# Altium PCB 数粒机接收板12通道.PcbDoc (part 5 of 5)
Units mm, origin at the board's own origin, x right, y up, seen from the top; angles counter-clockwise.
Board outline 316 x 52 mm, 2 copper layers (Top Layer, Bottom Layer); 209 components, 115 nets, 614 pads, 284 vias.
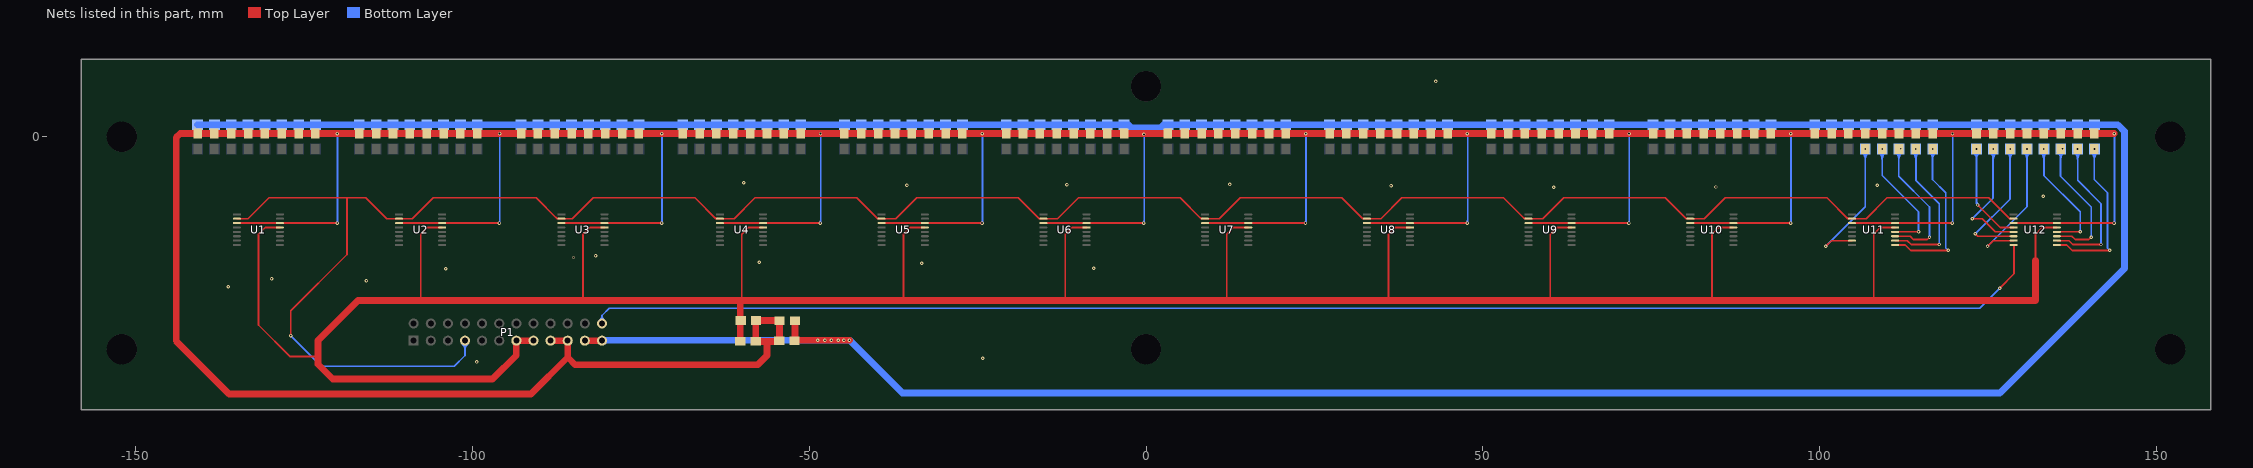
[diagram p5: the nets of this part, all layers, seen from the top]

## Via types
v1: diameter 0.508, hole 0.254, Top Layer to Bottom Layer, 284 vias

## Nets (pads, with @x,y where several pads share a name; then routed paths per layer and width w, separated by ;. In a path a pad name is that pad's centre, name@x,y a point inside that pad or via, vN(x,y) a via of type N, cw(c..) or ccw(c..) an arc to the next point about the centre after c; other vN are vias at no path point) (continued)
CH11-4: D84.1 R84.2 U11.7 | length 37.6
  Top Layer w0.254: v1(100.887,-16.237) 101.724,-15.4 U11.7@104.773,-15.4 ; v1@100.887,-16.11 ccw(c100.887,-15.803) 101.104,-16.02 ; v1@100.887,-16.11 ccw(c100.887,-15.803) 101.104,-16.02 ; v1@100.887,-16.11 ccw(c100.887,-15.803) 101.104,-16.02 ; v1@101.014,-16.237 cw(c101.32,-16.237) 101.104,-16.02 ; v1@101.014,-16.237 cw(c101.32,-16.237) 101.104,-16.02 ; v1@101.014,-16.237 cw(c101.32,-16.237) 101.104,-16.02
  Bottom Layer w0.254: v1(100.887,-16.237) 106.74,-10.383 D84.1@106.74,-2.086 ; v1@100.887,-16.11 ccw(c100.887,-15.803) 101.104,-16.02 ; v1@100.887,-16.11 ccw(c100.887,-15.803) 101.104,-16.02 ; v1@100.887,-16.11 ccw(c100.887,-15.803) 101.104,-16.02 ; v1@101.014,-16.237 cw(c101.32,-16.237) 101.104,-16.02 ; v1@101.014,-16.237 cw(c101.32,-16.237) 101.104,-16.02 ; v1@101.014,-16.237 cw(c101.32,-16.237) 101.104,-16.02 ; D84.1@106.274,-2.276 cw(c105.149,-3.401) 106.74,-3.401 ; D84.1@106.274,-2.276 cw(c105.149,-3.401) 106.74,-3.401 ; D84.1@106.274,-2.276 cw(c105.149,-3.401) 106.74,-3.401 ; D84.1@106.454,-2.096 cw(c105.763,-2.787) 106.74,-2.787 ; D84.1@106.454,-2.096 cw(c105.763,-2.787) 106.74,-2.787 ; D84.1@106.454,-2.096 cw(c105.763,-2.787) 106.74,-2.787 ; D84.1@106.66,-1.89 cw(c106.468,-2.082) D84.1@106.74,-2.082 ; D84.1@106.66,-1.89 cw(c106.468,-2.082) D84.1@106.74,-2.082 ; D84.1@106.66,-1.89 cw(c106.468,-2.082) D84.1@106.74,-2.082 ; 106.74,-3.449 cw(c108.399,-3.449) D84.1@107.226,-2.276 ; 106.74,-3.449 cw(c108.399,-3.449) D84.1@107.226,-2.276 ; 106.74,-3.449 cw(c108.399,-3.449) D84.1@107.226,-2.276 ; 106.74,-2.836 cw(c107.786,-2.836) D84.1@107.046,-2.096 ; 106.74,-2.836 cw(c107.786,-2.836) D84.1@107.046,-2.096 ; 106.74,-2.836 cw(c107.786,-2.836) D84.1@107.046,-2.096 ; D84.1@106.74,-2.131 cw(c107.081,-2.131) D84.1@106.84,-1.89 ; D84.1@106.74,-2.131 cw(c107.081,-2.131) D84.1@106.84,-1.89 ; D84.1@106.74,-2.131 cw(c107.081,-2.131) D84.1@106.84,-1.89
  other v1: 106.75,-1.8
CH11-5: D85.1 R85.2 U11.12 | length 33.5
  Top Layer w0.254: U11.12@111.224,-14.1 114.629,-14.1 v1(114.654,-14.076) ; 114.288,-14.1 ccw(c114.288,-13.71) v1@114.564,-13.986 ; 114.288,-14.1 ccw(c114.288,-13.71) v1@114.564,-13.986 ; 114.288,-14.1 ccw(c114.288,-13.71) v1@114.564,-13.986
  Bottom Layer w0.254: D85.1@109.255,-2.05 109.255,-5.73 114.654,-11.129 v1(114.654,-14.076) ; D85.1@108.774,-2.276 cw(c107.614,-3.436) 109.255,-3.436 ; D85.1@108.774,-2.276 cw(c107.614,-3.436) 109.255,-3.436 ; D85.1@108.774,-2.276 cw(c107.614,-3.436) 109.255,-3.436 ; D85.1@108.954,-2.096 cw(c108.227,-2.823) 109.255,-2.823 ; D85.1@108.954,-2.096 cw(c108.227,-2.823) 109.255,-2.823 ; D85.1@108.954,-2.096 cw(c108.227,-2.823) 109.255,-2.823 ; D85.1@109.16,-1.89 cw(c108.932,-2.118) D85.1@109.255,-2.118 ; D85.1@109.16,-1.89 cw(c108.932,-2.118) D85.1@109.255,-2.118 ; D85.1@109.16,-1.89 cw(c108.932,-2.118) D85.1@109.255,-2.118 ; 109.255,-3.414 cw(c110.864,-3.414) D85.1@109.726,-2.276 ; 109.255,-3.414 cw(c110.864,-3.414) D85.1@109.726,-2.276 ; 109.255,-3.414 cw(c110.864,-3.414) D85.1@109.726,-2.276 ; 109.255,-2.8 cw(c110.25,-2.8) D85.1@109.546,-2.096 ; 109.255,-2.8 cw(c110.25,-2.8) D85.1@109.546,-2.096 ; 109.255,-2.8 cw(c110.25,-2.8) D85.1@109.546,-2.096 ; D85.1@109.255,-2.095 cw(c109.546,-2.095) D85.1@109.34,-1.89 ; D85.1@109.255,-2.095 cw(c109.546,-2.095) D85.1@109.34,-1.89 ; D85.1@109.255,-2.095 cw(c109.546,-2.095) D85.1@109.34,-1.89 ; 114.654,-13.769 cw(c114.347,-13.769) 114.564,-13.986 ccw(c114.347,-13.769) 114.654,-13.769 ; 114.654,-13.769 ccw(c114.96,-13.769) 114.743,-13.986 cw(c114.96,-13.769) 114.654,-13.769
  other v1: 109.25,-1.8
CH11-6: D86.1 R86.2 U11.11 | length 34
  Top Layer w0.254: U11.11@111.224,-14.75 113.398,-14.75 113.892,-15.244 115.924,-15.244 v1(116.279,-14.888)
  Bottom Layer w0.254: D86.1@111.718,-2.013 111.718,-5.857 116.279,-10.418 v1(116.279,-14.888) ; D86.1@111.274,-2.276 cw(c110.202,-3.348) 111.718,-3.348 ; D86.1@111.274,-2.276 cw(c110.202,-3.348) 111.718,-3.348 ; D86.1@111.274,-2.276 cw(c110.202,-3.348) 111.718,-3.348 ; D86.1@111.454,-2.096 cw(c110.815,-2.735) 111.718,-2.735 ; D86.1@111.454,-2.096 cw(c110.815,-2.735) 111.718,-2.735 ; D86.1@111.454,-2.096 cw(c110.815,-2.735) 111.718,-2.735 ; 111.718,-3.501 cw(c113.451,-3.501) D86.1@112.226,-2.276 ; 111.718,-3.501 cw(c113.451,-3.501) D86.1@112.226,-2.276 ; 111.718,-3.501 cw(c113.451,-3.501) D86.1@112.226,-2.276 ; 111.718,-2.888 cw(c112.838,-2.888) D86.1@112.046,-2.096 ; 111.718,-2.888 cw(c112.838,-2.888) D86.1@112.046,-2.096 ; 111.718,-2.888 cw(c112.838,-2.888) D86.1@112.046,-2.096 ; v1@116.189,-14.799 ccw(c115.973,-14.582) 116.279,-14.582 ; v1@116.189,-14.799 ccw(c115.973,-14.582) 116.279,-14.582 ; v1@116.189,-14.799 ccw(c115.973,-14.582) 116.279,-14.582 ; 116.279,-14.582 ccw(c116.586,-14.582) v1@116.369,-14.799 ; 116.279,-14.582 ccw(c116.586,-14.582) v1@116.369,-14.799 ; 116.279,-14.582 ccw(c116.586,-14.582) v1@116.369,-14.799
  other v1: 112.026,-1.775
CH11-7: D87.1 R87.2 U11.10 | length 38.9
  Top Layer w0.254: U11.10@111.224,-15.4 112.981,-15.4 113.561,-15.981 v1(117.727,-15.981) ; 117.42,-15.981 cw(c117.42,-16.287) v1@117.637,-16.07 ; 117.42,-15.981 ccw(c117.42,-15.674) v1@117.637,-15.891 ; 117.42,-15.981 cw(c117.42,-16.287) v1@117.637,-16.07 ; 117.42,-15.981 ccw(c117.42,-15.674) v1@117.637,-15.891 ; 117.42,-15.981 ccw(c117.42,-15.674) v1@117.637,-15.891 ; 117.42,-15.981 cw(c117.42,-16.287) v1@117.637,-16.07
  Bottom Layer w0.254: D87.1@114.258,-2.053 114.258,-6.441 117.727,-9.91 v1(117.727,-15.981) ; D87.1@113.774,-2.276 cw(c112.605,-3.445) 114.258,-3.445 ; D87.1@113.774,-2.276 cw(c112.605,-3.445) 114.258,-3.445 ; D87.1@113.774,-2.276 cw(c112.605,-3.445) 114.258,-3.445 ; D87.1@113.954,-2.096 cw(c113.218,-2.832) 114.258,-2.832 ; D87.1@113.954,-2.096 cw(c113.218,-2.832) 114.258,-2.832 ; D87.1@113.954,-2.096 cw(c113.218,-2.832) 114.258,-2.832 ; D87.1@114.16,-1.89 cw(c113.923,-2.127) D87.1@114.258,-2.127 ; D87.1@114.16,-1.89 cw(c113.923,-2.127) D87.1@114.258,-2.127 ; D87.1@114.16,-1.89 cw(c113.923,-2.127) D87.1@114.258,-2.127 ; 114.258,-3.404 cw(c115.854,-3.404) D87.1@114.726,-2.276 ; 114.258,-3.404 cw(c115.854,-3.404) D87.1@114.726,-2.276 ; 114.258,-3.404 cw(c115.854,-3.404) D87.1@114.726,-2.276 ; 114.258,-2.791 cw(c115.241,-2.791) D87.1@114.546,-2.096 ; 114.258,-2.791 cw(c115.241,-2.791) D87.1@114.546,-2.096 ; 114.258,-2.791 cw(c115.241,-2.791) D87.1@114.546,-2.096 ; D87.1@114.258,-2.086 cw(c114.536,-2.086) D87.1@114.34,-1.89 ; D87.1@114.258,-2.086 cw(c114.536,-2.086) D87.1@114.34,-1.89 ; D87.1@114.258,-2.086 cw(c114.536,-2.086) D87.1@114.34,-1.89 ; v1@117.637,-15.891 ccw(c117.42,-15.674) 117.727,-15.674 ; v1@117.637,-15.891 ccw(c117.42,-15.674) 117.727,-15.674 ; v1@117.637,-15.891 ccw(c117.42,-15.674) 117.727,-15.674 ; 117.727,-15.674 ccw(c118.034,-15.674) v1@117.817,-15.891 ; 117.727,-15.674 ccw(c118.034,-15.674) v1@117.817,-15.891 ; 117.727,-15.674 ccw(c118.034,-15.674) v1@117.817,-15.891
  other v1: 114.25,-1.8
CH11-8: D88.1 R88.2 U11.9 | length 38.3
  Top Layer w0.254: U11.9@111.224,-16.05 112.666,-16.05 113.485,-16.87 119.022,-16.87 v1(119.048,-16.844) ; 118.68,-16.87 ccw(c118.68,-16.476) v1@118.958,-16.754 ; 118.68,-16.87 ccw(c118.68,-16.476) v1@118.958,-16.754 ; 118.68,-16.87 ccw(c118.68,-16.476) v1@118.958,-16.754
  Bottom Layer w0.254: D88.1@116.722,-2.017 116.722,-6.34 118.692,-8.31 118.692,-16.489 v1(119.048,-16.844) ; D88.1@116.274,-2.276 cw(c115.192,-3.358) 116.722,-3.358 ; D88.1@116.274,-2.276 cw(c115.192,-3.358) 116.722,-3.358 ; D88.1@116.274,-2.276 cw(c115.192,-3.358) 116.722,-3.358 ; D88.1@116.454,-2.096 cw(c115.806,-2.744) 116.722,-2.744 ; D88.1@116.454,-2.096 cw(c115.806,-2.744) 116.722,-2.744 ; D88.1@116.454,-2.096 cw(c115.806,-2.744) 116.722,-2.744 ; 116.722,-3.492 cw(c118.442,-3.492) D88.1@117.226,-2.276 ; 116.722,-3.492 cw(c118.442,-3.492) D88.1@117.226,-2.276 ; 116.722,-3.492 cw(c118.442,-3.492) D88.1@117.226,-2.276 ; 116.722,-2.879 cw(c117.829,-2.879) D88.1@117.046,-2.096 ; 116.722,-2.879 cw(c117.829,-2.879) D88.1@117.046,-2.096 ; 116.722,-2.879 cw(c117.829,-2.879) D88.1@117.046,-2.096 ; D88.1@116.722,-2.174 cw(c117.124,-2.174) D88.1@116.84,-1.89 ; D88.1@116.722,-2.174 cw(c117.124,-2.174) D88.1@116.84,-1.89 ; D88.1@116.722,-2.174 cw(c117.124,-2.174) D88.1@116.84,-1.89
  other v1: 116.75,-1.8
CH12: P1.24 U12.8 | length 225.7
  Top Layer w0.254: v1(126.7,-22.45) 128.824,-20.326 128.824,-16.101 U12.8@128.773,-16.05 ; v1@126.7,-22.323 ccw(c126.7,-22.017) 126.917,-22.233 ; v1@126.7,-22.323 ccw(c126.7,-22.017) 126.917,-22.233 ; v1@126.7,-22.323 ccw(c126.7,-22.017) 126.917,-22.233 ; v1@126.827,-22.45 cw(c127.134,-22.45) 126.917,-22.233 ; v1@126.827,-22.45 cw(c127.134,-22.45) 126.917,-22.233 ; v1@126.827,-22.45 cw(c127.134,-22.45) 126.917,-22.233 ; U12.8@128.757,-16.066 cw(c128.595,-16.228) 128.824,-16.228 ccw(c128.595,-16.228) U12.8@128.757,-16.066
  Bottom Layer w0.254: P1.24@-80.742,-27.708 -80.742,-26.514 ; v1(126.7,-22.45) 123.725,-25.425 -79.653,-25.425 -80.742,-26.514 ; P1.24@-81.098,-27.197 ccw(c-81.574,-26.514) -80.742,-26.514 ; P1.24@-81.098,-27.197 ccw(c-81.574,-26.514) -80.742,-26.514 ; P1.24@-81.098,-27.197 ccw(c-81.574,-26.514) -80.742,-26.514 ; -80.742,-26.514 ccw(c-79.91,-26.514) P1.24@-80.386,-27.197 ; -80.742,-26.514 ccw(c-79.91,-26.514) P1.24@-80.386,-27.197 ; -80.742,-26.514 ccw(c-79.91,-26.514) P1.24@-80.386,-27.197 ; 126.483,-22.667 cw(c126.7,-22.884) v1@126.7,-22.577 ; 126.483,-22.667 ccw(c126.266,-22.45) v1@126.573,-22.45 ; 126.483,-22.667 cw(c126.7,-22.884) v1@126.7,-22.577 ; 126.483,-22.667 ccw(c126.266,-22.45) v1@126.573,-22.45 ; 126.483,-22.667 ccw(c126.266,-22.45) v1@126.573,-22.45 ; 126.483,-22.667 cw(c126.7,-22.884) v1@126.7,-22.577
CH12-1: D89.1 R89.2 U12.4 | length 32.6
  Top Layer w0.254: v1(123.429,-10.111) 126.769,-13.45 U12.4@128.773,-13.45 ; v1@123.429,-10.238 cw(c123.429,-10.544) 123.646,-10.328 ; v1@123.429,-10.238 cw(c123.429,-10.544) 123.646,-10.328 ; v1@123.429,-10.238 cw(c123.429,-10.544) 123.646,-10.328 ; v1@123.556,-10.111 ccw(c123.863,-10.111) 123.646,-10.328 ; v1@123.556,-10.111 ccw(c123.863,-10.111) 123.646,-10.328 ; v1@123.556,-10.111 ccw(c123.863,-10.111) 123.646,-10.328
  Bottom Layer w0.254: v1(123.25,-1.8) 123.25,-9.931 v1(123.429,-10.111) ; D89.1@122.774,-2.276 cw(c121.625,-3.425) 123.25,-3.425 ; D89.1@122.774,-2.276 cw(c121.625,-3.425) 123.25,-3.425 ; D89.1@122.774,-2.276 cw(c121.625,-3.425) 123.25,-3.425 ; D89.1@122.954,-2.096 cw(c122.239,-2.811) 123.25,-2.811 ; D89.1@122.954,-2.096 cw(c122.239,-2.811) 123.25,-2.811 ; D89.1@122.954,-2.096 cw(c122.239,-2.811) 123.25,-2.811 ; D89.1@123.16,-1.89 cw(c122.943,-2.107) D89.1@123.25,-2.107 ; D89.1@123.16,-1.89 cw(c122.943,-2.107) D89.1@123.25,-2.107 ; D89.1@123.16,-1.89 cw(c122.943,-2.107) D89.1@123.25,-2.107 ; 123.25,-9.371 ccw(c124.169,-9.371) v1@123.519,-10.021 ; 123.25,-9.371 ccw(c124.169,-9.371) v1@123.519,-10.021 ; 123.25,-9.371 ccw(c124.169,-9.371) v1@123.519,-10.021 ; 123.25,-3.425 cw(c124.875,-3.425) D89.1@123.726,-2.276 ; 123.25,-3.425 cw(c124.875,-3.425) D89.1@123.726,-2.276 ; 123.25,-3.425 cw(c124.875,-3.425) D89.1@123.726,-2.276 ; 123.25,-2.812 cw(c124.262,-2.812) D89.1@123.546,-2.096 ; 123.25,-2.812 cw(c124.262,-2.812) D89.1@123.546,-2.096 ; 123.25,-2.812 cw(c124.262,-2.812) D89.1@123.546,-2.096 ; D89.1@123.25,-2.107 cw(c123.557,-2.107) D89.1@123.34,-1.89 ; D89.1@123.25,-2.107 cw(c123.557,-2.107) D89.1@123.34,-1.89 ; D89.1@123.25,-2.107 cw(c123.557,-2.107) D89.1@123.34,-1.89
CH12-2: D90.1 R90.2 U12.5 | length 34.7
  Top Layer w0.254: v1(122.626,-12.171) 124.125,-12.171 126.054,-14.1 U12.5@128.773,-14.1 ; v1@122.716,-12.26 cw(c122.933,-12.477) 122.933,-12.171 ; v1@122.716,-12.26 cw(c122.933,-12.477) 122.933,-12.171 ; v1@122.716,-12.26 cw(c122.933,-12.477) 122.933,-12.171 ; v1@122.716,-12.081 ccw(c122.933,-11.864) 122.933,-12.171 ; v1@122.716,-12.081 ccw(c122.933,-11.864) 122.933,-12.171 ; v1@122.716,-12.081 ccw(c122.933,-11.864) 122.933,-12.171
  Bottom Layer w0.254: v1(122.626,-12.171) 125.711,-9.086 D90.1@125.711,-2.057 ; v1@122.626,-12.044 ccw(c122.626,-11.737) 122.843,-11.954 ; v1@122.626,-12.044 ccw(c122.626,-11.737) 122.843,-11.954 ; v1@122.626,-12.044 ccw(c122.626,-11.737) 122.843,-11.954 ; v1@122.753,-12.171 cw(c123.06,-12.171) 122.843,-11.954 ; v1@122.753,-12.171 cw(c123.06,-12.171) 122.843,-11.954 ; v1@122.753,-12.171 cw(c123.06,-12.171) 122.843,-11.954 ; D90.1@125.274,-2.276 cw(c124.22,-3.33) 125.711,-3.33 ; D90.1@125.274,-2.276 cw(c124.22,-3.33) 125.711,-3.33 ; D90.1@125.274,-2.276 cw(c124.22,-3.33) 125.711,-3.33 ; D90.1@125.454,-2.096 cw(c124.833,-2.717) 125.711,-2.717 ; D90.1@125.454,-2.096 cw(c124.833,-2.717) 125.711,-2.717 ; D90.1@125.454,-2.096 cw(c124.833,-2.717) 125.711,-2.717 ; 125.711,-3.519 cw(c127.469,-3.519) D90.1@126.226,-2.276 ; 125.711,-3.519 cw(c127.469,-3.519) D90.1@126.226,-2.276 ; 125.711,-3.519 cw(c127.469,-3.519) D90.1@126.226,-2.276 ; 125.711,-2.906 cw(c126.856,-2.906) D90.1@126.046,-2.096 ; 125.711,-2.906 cw(c126.856,-2.906) D90.1@126.046,-2.096 ; 125.711,-2.906 cw(c126.856,-2.906) D90.1@126.046,-2.096 ; D90.1@125.711,-2.201 cw(c126.151,-2.201) D90.1@125.84,-1.89 ; D90.1@125.711,-2.201 cw(c126.151,-2.201) D90.1@125.84,-1.89 ; D90.1@125.711,-2.201 cw(c126.151,-2.201) D90.1@125.84,-1.89
  other v1: 125.75,-1.8
CH12-3: D91.1 R91.2 U12.6 | length 36.1
  Top Layer w0.254: v1(123.083,-14.38) 123.083,-14.431 123.402,-14.75 U12.6@128.773,-14.75 ; v1@123.21,-14.38 ccw(c123.64,-14.38) 123.336,-14.684 ; v1@123.21,-14.38 ccw(c123.64,-14.38) 123.336,-14.684 ; v1@123.21,-14.38 ccw(c123.64,-14.38) 123.336,-14.684
  Bottom Layer w0.254: v1(123.083,-14.38) 128.225,-9.238 D91.1@128.225,-2.071 ; v1@123.083,-14.253 ccw(c123.083,-13.947) 123.3,-14.164 ; v1@123.083,-14.253 ccw(c123.083,-13.947) 123.3,-14.164 ; v1@123.083,-14.253 ccw(c123.083,-13.947) 123.3,-14.164 ; v1@123.21,-14.38 cw(c123.517,-14.38) 123.3,-14.164 ; v1@123.21,-14.38 cw(c123.517,-14.38) 123.3,-14.164 ; v1@123.21,-14.38 cw(c123.517,-14.38) 123.3,-14.164 ; D91.1@127.774,-2.276 cw(c126.685,-3.365) 128.225,-3.365 ; D91.1@127.774,-2.276 cw(c126.685,-3.365) 128.225,-3.365 ; D91.1@127.774,-2.276 cw(c126.685,-3.365) 128.225,-3.365 ; D91.1@127.954,-2.096 cw(c127.298,-2.752) 128.225,-2.752 ; D91.1@127.954,-2.096 cw(c127.298,-2.752) 128.225,-2.752 ; D91.1@127.954,-2.096 cw(c127.298,-2.752) 128.225,-2.752 ; 128.225,-3.484 cw(c129.934,-3.484) D91.1@128.726,-2.276 ; 128.225,-3.484 cw(c129.934,-3.484) D91.1@128.726,-2.276 ; 128.225,-3.484 cw(c129.934,-3.484) D91.1@128.726,-2.276 ; 128.225,-2.871 cw(c129.321,-2.871) D91.1@128.546,-2.096 ; 128.225,-2.871 cw(c129.321,-2.871) D91.1@128.546,-2.096 ; 128.225,-2.871 cw(c129.321,-2.871) D91.1@128.546,-2.096 ; D91.1@128.225,-2.166 cw(c128.616,-2.166) D91.1@128.34,-1.89 ; D91.1@128.225,-2.166 cw(c128.616,-2.166) D91.1@128.34,-1.89 ; D91.1@128.225,-2.166 cw(c128.616,-2.166) D91.1@128.34,-1.89
  other v1: 128.25,-1.8
CH12-4: D92.1 R92.2 U12.7 | length 37.6
  Top Layer w0.254: v1(124.887,-16.237) 125.724,-15.4 U12.7@128.773,-15.4 ; v1@124.887,-16.11 ccw(c124.887,-15.803) 125.104,-16.02 ; v1@124.887,-16.11 ccw(c124.887,-15.803) 125.104,-16.02 ; v1@124.887,-16.11 ccw(c124.887,-15.803) 125.104,-16.02 ; v1@125.014,-16.237 cw(c125.32,-16.237) 125.104,-16.02 ; v1@125.014,-16.237 cw(c125.32,-16.237) 125.104,-16.02 ; v1@125.014,-16.237 cw(c125.32,-16.237) 125.104,-16.02
  Bottom Layer w0.254: v1(124.887,-16.237) 130.74,-10.383 D92.1@130.74,-2.086 ; v1@124.887,-16.11 ccw(c124.887,-15.803) 125.104,-16.02 ; v1@124.887,-16.11 ccw(c124.887,-15.803) 125.104,-16.02 ; v1@124.887,-16.11 ccw(c124.887,-15.803) 125.104,-16.02 ; v1@125.014,-16.237 cw(c125.32,-16.237) 125.104,-16.02 ; v1@125.014,-16.237 cw(c125.32,-16.237) 125.104,-16.02 ; v1@125.014,-16.237 cw(c125.32,-16.237) 125.104,-16.02 ; D92.1@130.274,-2.276 cw(c129.149,-3.401) 130.74,-3.401 ; D92.1@130.274,-2.276 cw(c129.149,-3.401) 130.74,-3.401 ; D92.1@130.274,-2.276 cw(c129.149,-3.401) 130.74,-3.401 ; D92.1@130.454,-2.096 cw(c129.763,-2.787) 130.74,-2.787 ; D92.1@130.454,-2.096 cw(c129.763,-2.787) 130.74,-2.787 ; D92.1@130.454,-2.096 cw(c129.763,-2.787) 130.74,-2.787 ; D92.1@130.66,-1.89 cw(c130.468,-2.082) D92.1@130.74,-2.082 ; D92.1@130.66,-1.89 cw(c130.468,-2.082) D92.1@130.74,-2.082 ; D92.1@130.66,-1.89 cw(c130.468,-2.082) D92.1@130.74,-2.082 ; 130.74,-3.449 cw(c132.399,-3.449) D92.1@131.226,-2.276 ; 130.74,-3.449 cw(c132.399,-3.449) D92.1@131.226,-2.276 ; 130.74,-3.449 cw(c132.399,-3.449) D92.1@131.226,-2.276 ; 130.74,-2.836 cw(c131.786,-2.836) D92.1@131.046,-2.096 ; 130.74,-2.836 cw(c131.786,-2.836) D92.1@131.046,-2.096 ; 130.74,-2.836 cw(c131.786,-2.836) D92.1@131.046,-2.096 ; D92.1@130.74,-2.131 cw(c131.081,-2.131) D92.1@130.84,-1.89 ; D92.1@130.74,-2.131 cw(c131.081,-2.131) D92.1@130.84,-1.89 ; D92.1@130.74,-2.131 cw(c131.081,-2.131) D92.1@130.84,-1.89
  other v1: 130.75,-1.8
CH12-5: D93.1 R93.2 U12.12 | length 33.9
  Top Layer w0.254: U12.12@135.224,-14.1 138.629,-14.1 v1(138.654,-14.076) ; 138.288,-14.1 ccw(c138.288,-13.71) v1@138.564,-13.986 ; 138.288,-14.1 ccw(c138.288,-13.71) v1@138.564,-13.986 ; 138.288,-14.1 ccw(c138.288,-13.71) v1@138.564,-13.986
  Bottom Layer w0.254: D93.1@133.255,-2.05 133.255,-5.73 138.654,-11.129 v1(138.654,-14.076) ; D93.1@132.774,-2.276 cw(c131.614,-3.436) 133.255,-3.436 ; D93.1@132.774,-2.276 cw(c131.614,-3.436) 133.255,-3.436 ; D93.1@132.774,-2.276 cw(c131.614,-3.436) 133.255,-3.436 ; D93.1@132.954,-2.096 cw(c132.227,-2.823) 133.255,-2.823 ; D93.1@132.954,-2.096 cw(c132.227,-2.823) 133.255,-2.823 ; D93.1@132.954,-2.096 cw(c132.227,-2.823) 133.255,-2.823 ; D93.1@133.16,-1.89 cw(c132.932,-2.118) D93.1@133.255,-2.118 ; D93.1@133.16,-1.89 cw(c132.932,-2.118) D93.1@133.255,-2.118 ; D93.1@133.16,-1.89 cw(c132.932,-2.118) D93.1@133.255,-2.118 ; 133.255,-3.414 cw(c134.864,-3.414) D93.1@133.726,-2.276 ; 133.255,-3.414 cw(c134.864,-3.414) D93.1@133.726,-2.276 ; 133.255,-3.414 cw(c134.864,-3.414) D93.1@133.726,-2.276 ; 133.255,-2.8 cw(c134.25,-2.8) D93.1@133.546,-2.096 ; 133.255,-2.8 cw(c134.25,-2.8) D93.1@133.546,-2.096 ; 133.255,-2.8 cw(c134.25,-2.8) D93.1@133.546,-2.096 ; D93.1@133.255,-2.095 cw(c133.546,-2.095) D93.1@133.34,-1.89 ; D93.1@133.255,-2.095 cw(c133.546,-2.095) D93.1@133.34,-1.89 ; D93.1@133.255,-2.095 cw(c133.546,-2.095) D93.1@133.34,-1.89 ; v1@138.564,-13.986 ccw(c138.347,-13.769) 138.654,-13.769 ; v1@138.564,-13.986 ccw(c138.347,-13.769) 138.654,-13.769 ; v1@138.564,-13.986 ccw(c138.347,-13.769) 138.654,-13.769 ; 138.654,-13.769 ccw(c138.96,-13.769) v1@138.743,-13.986 ; 138.654,-13.769 ccw(c138.96,-13.769) v1@138.743,-13.986 ; 138.654,-13.769 ccw(c138.96,-13.769) v1@138.743,-13.986
  other v1: 133.25,-1.8
CH12-6: D94.1 R94.2 U12.11 | length 34
  Top Layer w0.254: U12.11@135.224,-14.75 137.398,-14.75 137.892,-15.244 139.924,-15.244 v1(140.279,-14.888)
  Bottom Layer w0.254: D94.1@135.718,-2.013 135.718,-5.857 140.279,-10.418 v1(140.279,-14.888) ; D94.1@135.274,-2.276 cw(c134.202,-3.348) 135.718,-3.348 ; D94.1@135.274,-2.276 cw(c134.202,-3.348) 135.718,-3.348 ; D94.1@135.274,-2.276 cw(c134.202,-3.348) 135.718,-3.348 ; D94.1@135.454,-2.096 cw(c134.815,-2.735) 135.718,-2.735 ; D94.1@135.454,-2.096 cw(c134.815,-2.735) 135.718,-2.735 ; D94.1@135.454,-2.096 cw(c134.815,-2.735) 135.718,-2.735 ; 135.718,-3.501 cw(c137.451,-3.501) D94.1@136.226,-2.276 ; 135.718,-3.501 cw(c137.451,-3.501) D94.1@136.226,-2.276 ; 135.718,-3.501 cw(c137.451,-3.501) D94.1@136.226,-2.276 ; 135.718,-2.888 cw(c136.838,-2.888) D94.1@136.046,-2.096 ; 135.718,-2.888 cw(c136.838,-2.888) D94.1@136.046,-2.096 ; 135.718,-2.888 cw(c136.838,-2.888) D94.1@136.046,-2.096 ; v1@140.189,-14.799 ccw(c139.973,-14.582) 140.279,-14.582 ; v1@140.189,-14.799 ccw(c139.973,-14.582) 140.279,-14.582 ; v1@140.189,-14.799 ccw(c139.973,-14.582) 140.279,-14.582 ; 140.279,-14.582 ccw(c140.586,-14.582) v1@140.369,-14.799 ; 140.279,-14.582 ccw(c140.586,-14.582) v1@140.369,-14.799 ; 140.279,-14.582 ccw(c140.586,-14.582) v1@140.369,-14.799
  other v1: 136.026,-1.775
CH12-7: D95.1 R95.2 U12.10 | length 38.9
  Top Layer w0.254: U12.10@135.224,-15.4 136.981,-15.4 137.561,-15.981 v1(141.727,-15.981) ; 141.42,-15.981 cw(c141.42,-16.287) v1@141.637,-16.07 ; 141.42,-15.981 ccw(c141.42,-15.674) v1@141.637,-15.891 ; 141.42,-15.981 cw(c141.42,-16.287) v1@141.637,-16.07 ; 141.42,-15.981 ccw(c141.42,-15.674) v1@141.637,-15.891 ; 141.42,-15.981 ccw(c141.42,-15.674) v1@141.637,-15.891 ; 141.42,-15.981 cw(c141.42,-16.287) v1@141.637,-16.07
  Bottom Layer w0.254: D95.1@138.258,-2.053 138.258,-6.441 141.727,-9.91 v1(141.727,-15.981) ; D95.1@137.774,-2.276 cw(c136.605,-3.445) 138.258,-3.445 ; D95.1@137.774,-2.276 cw(c136.605,-3.445) 138.258,-3.445 ; D95.1@137.774,-2.276 cw(c136.605,-3.445) 138.258,-3.445 ; D95.1@137.954,-2.096 cw(c137.218,-2.832) 138.258,-2.832 ; D95.1@137.954,-2.096 cw(c137.218,-2.832) 138.258,-2.832 ; D95.1@137.954,-2.096 cw(c137.218,-2.832) 138.258,-2.832 ; D95.1@138.16,-1.89 cw(c137.923,-2.127) D95.1@138.258,-2.127 ; D95.1@138.16,-1.89 cw(c137.923,-2.127) D95.1@138.258,-2.127 ; D95.1@138.16,-1.89 cw(c137.923,-2.127) D95.1@138.258,-2.127 ; 138.258,-3.404 cw(c139.854,-3.404) D95.1@138.726,-2.276 ; 138.258,-3.404 cw(c139.854,-3.404) D95.1@138.726,-2.276 ; 138.258,-3.404 cw(c139.854,-3.404) D95.1@138.726,-2.276 ; 138.258,-2.791 cw(c139.241,-2.791) D95.1@138.546,-2.096 ; 138.258,-2.791 cw(c139.241,-2.791) D95.1@138.546,-2.096 ; 138.258,-2.791 cw(c139.241,-2.791) D95.1@138.546,-2.096 ; D95.1@138.258,-2.086 cw(c138.536,-2.086) D95.1@138.34,-1.89 ; D95.1@138.258,-2.086 cw(c138.536,-2.086) D95.1@138.34,-1.89 ; D95.1@138.258,-2.086 cw(c138.536,-2.086) D95.1@138.34,-1.89 ; v1@141.637,-15.891 ccw(c141.42,-15.674) 141.727,-15.674 ; v1@141.637,-15.891 ccw(c141.42,-15.674) 141.727,-15.674 ; v1@141.637,-15.891 ccw(c141.42,-15.674) 141.727,-15.674 ; 141.727,-15.674 ccw(c142.034,-15.674) v1@141.817,-15.891 ; 141.727,-15.674 ccw(c142.034,-15.674) v1@141.817,-15.891 ; 141.727,-15.674 ccw(c142.034,-15.674) v1@141.817,-15.891
  other v1: 138.25,-1.8
CH12-8: D96.1 R96.2 U12.9 | length 38.3
  Top Layer w0.254: U12.9@135.224,-16.05 136.666,-16.05 137.485,-16.87 143.022,-16.87 v1(143.048,-16.844) ; 142.68,-16.87 ccw(c142.68,-16.476) v1@142.958,-16.754 ; 142.68,-16.87 ccw(c142.68,-16.476) v1@142.958,-16.754 ; 142.68,-16.87 ccw(c142.68,-16.476) v1@142.958,-16.754
  Bottom Layer w0.254: D96.1@140.722,-2.017 140.722,-6.34 142.692,-8.31 142.692,-16.489 v1(143.048,-16.844) ; D96.1@140.274,-2.276 cw(c139.192,-3.358) 140.722,-3.358 ; D96.1@140.274,-2.276 cw(c139.192,-3.358) 140.722,-3.358 ; D96.1@140.274,-2.276 cw(c139.192,-3.358) 140.722,-3.358 ; D96.1@140.454,-2.096 cw(c139.806,-2.744) 140.722,-2.744 ; D96.1@140.454,-2.096 cw(c139.806,-2.744) 140.722,-2.744 ; D96.1@140.454,-2.096 cw(c139.806,-2.744) 140.722,-2.744 ; 140.722,-3.492 cw(c142.442,-3.492) D96.1@141.226,-2.276 ; 140.722,-3.492 cw(c142.442,-3.492) D96.1@141.226,-2.276 ; 140.722,-3.492 cw(c142.442,-3.492) D96.1@141.226,-2.276 ; 140.722,-2.879 cw(c141.829,-2.879) D96.1@141.046,-2.096 ; 140.722,-2.879 cw(c141.829,-2.879) D96.1@141.046,-2.096 ; 140.722,-2.879 cw(c141.829,-2.879) D96.1@141.046,-2.096 ; D96.1@140.722,-2.174 cw(c141.124,-2.174) D96.1@140.84,-1.89 ; D96.1@140.722,-2.174 cw(c141.124,-2.174) D96.1@140.84,-1.89 ; D96.1@140.722,-2.174 cw(c141.124,-2.174) D96.1@140.84,-1.89
  other v1: 140.75,-1.8
EN: P1.7 U1.2 U2.2 U3.2 U4.2 U5.2 U6.2 U7.2 U8.2 U9.2 U10.2 U11.2 U12.2 | length 367.5
  Top Layer w0.254: U1.2@-134.931,-12.15 -133.26,-12.15 -130.156,-9.047 -118.624,-9.047 ; v1(-126.93,-29.493) -126.93,-25.814 -118.574,-17.458 -118.574,-9.097 -118.624,-9.047 ; U12.2@128.773,-12.15 128.168,-12.15 125.065,-9.047 109.977,-9.047 106.873,-12.15 U11.2@104.773,-12.15 104.168,-12.15 101.065,-9.047 85.977,-9.047 82.873,-12.15 U10.2@80.773,-12.15 80.168,-12.15 77.065,-9.047 61.977,-9.047 58.873,-12.15 U9.2@56.773,-12.15 56.168,-12.15 53.065,-9.047 37.977,-9.047 34.873,-12.15 U8.2@32.773,-12.15 32.168,-12.15 29.065,-9.047 13.977,-9.047 10.873,-12.15 U7.2@8.773,-12.15 8.168,-12.15 5.065,-9.047 -10.023,-9.047 -13.127,-12.15 U6.2@-15.227,-12.15 -15.832,-12.15 -18.935,-9.047 -34.023,-9.047 -37.127,-12.15 U5.2@-39.227,-12.15 -39.832,-12.15 -42.935,-9.047 -58.023,-9.047 -61.127,-12.15 U4.2@-63.227,-12.15 -63.832,-12.15 -66.935,-9.047 -82.023,-9.047 -85.127,-12.15 U3.2@-86.773,-12.15 -87.403,-12.15 -90.506,-9.047 -105.772,-9.047 -108.876,-12.15 U2.2@-110.852,-12.15 -112.676,-12.15 -115.779,-9.047 -118.624,-9.047 ; v1@-127.02,-29.404 ccw(c-127.237,-29.187) -126.93,-29.187 ; v1@-127.02,-29.404 ccw(c-127.237,-29.187) -126.93,-29.187 ; v1@-127.02,-29.404 ccw(c-127.237,-29.187) -126.93,-29.187 ; -126.93,-29.187 ccw(c-126.624,-29.187) v1@-126.84,-29.404 ; -126.93,-29.187 ccw(c-126.624,-29.187) v1@-126.84,-29.404 ; -126.93,-29.187 ccw(c-126.624,-29.187) v1@-126.84,-29.404 ; -87.57,-11.983 ccw(c-87.223,-11.637) -87.223,-12.127 cw(c-87.223,-11.637) -87.57,-11.983 ; -63.981,-12.001 ccw(c-63.677,-11.698) -63.677,-12.127 cw(c-63.677,-11.698) -63.981,-12.001 ; -39.981,-12.001 ccw(c-39.677,-11.698) -39.677,-12.127 cw(c-39.677,-11.698) -39.981,-12.001 ; -15.981,-12.001 ccw(c-15.677,-11.698) -15.677,-12.127 cw(c-15.677,-11.698) -15.981,-12.001 ; 8.019,-12.001 ccw(c8.323,-11.698) 8.323,-12.127 cw(c8.323,-11.698) 8.019,-12.001 ; 32.019,-12.001 ccw(c32.323,-11.698) 32.323,-12.127 cw(c32.323,-11.698) 32.019,-12.001 ; 56.019,-12.001 ccw(c56.323,-11.698) 56.323,-12.127 cw(c56.323,-11.698) 56.019,-12.001 ; 80.019,-12.001 ccw(c80.323,-11.698) 80.323,-12.127 cw(c80.323,-11.698) 80.019,-12.001 ; 104.019,-12.001 ccw(c104.323,-11.698) 104.323,-12.127 cw(c104.323,-11.698) 104.019,-12.001 ; 128.019,-12.001 ccw(c128.323,-11.698) 128.323,-12.127 cw(c128.323,-11.698) 128.019,-12.001
  Bottom Layer w0.254: v1(-126.93,-29.493) -122.391,-34.033 -102.637,-34.033 -101.062,-32.458 P1.7@-101.062,-30.248 ; v1@-126.93,-29.62 cw(c-126.93,-29.927) -126.713,-29.71 ; v1@-126.93,-29.62 cw(c-126.93,-29.927) -126.713,-29.71 ; v1@-126.93,-29.62 cw(c-126.93,-29.927) -126.713,-29.71 ; v1@-126.803,-29.493 ccw(c-126.497,-29.493) -126.713,-29.71 ; v1@-126.803,-29.493 ccw(c-126.497,-29.493) -126.713,-29.71 ; v1@-126.803,-29.493 ccw(c-126.497,-29.493) -126.713,-29.71 ; P1.7@-101.502,-30.689 cw(c-102.566,-31.752) -101.062,-31.752 ; P1.7@-101.502,-30.689 cw(c-102.566,-31.752) -101.062,-31.752 ; P1.7@-101.502,-30.689 cw(c-102.566,-31.752) -101.062,-31.752 ; P1.7@-101.323,-30.509 cw(c-101.953,-31.139) -101.062,-31.139 ; P1.7@-101.323,-30.509 cw(c-101.953,-31.139) -101.062,-31.139 ; P1.7@-101.323,-30.509 cw(c-101.953,-31.139) -101.062,-31.139 ; -101.062,-31.752 cw(c-99.558,-31.752) P1.7@-100.621,-30.689 ; -101.062,-31.752 cw(c-99.558,-31.752) P1.7@-100.621,-30.689 ; -101.062,-31.752 cw(c-99.558,-31.752) P1.7@-100.621,-30.689 ; -101.062,-31.139 cw(c-100.171,-31.139) P1.7@-100.801,-30.509 ; -101.062,-31.139 cw(c-100.171,-31.139) P1.7@-100.801,-30.509 ; -101.062,-31.139 cw(c-100.171,-31.139) P1.7@-100.801,-30.509
GND: C1.1 C2.1 C3.1 C4.1 P1.17 P1.19 R1.1 R2.1 R3.1 R4.1 R5.1 R6.1 R7.1 R8.1 R9.1 R10.1 R11.1 R12.1 R13.1 R14.1 R15.1 R16.1 R17.1 R18.1 R19.1 R20.1 R21.1 R22.1 R23.1 R24.1 R25.1 R26.1 R27.1 R28.1 R29.1 R30.1 R31.1 R32.1 R33.1 R34.1 R35.1 R36.1 R37.1 R38.1 R39.1 R40.1 R41.1 R42.1 R43.1 R44.1 R45.1 R46.1 R47.1 R48.1 R49.1 R50.1 R51.1 R52.1 R53.1 R54.1 R55.1 R56.1 R57.1 R58.1 R59.1 R60.1 R61.1 R62.1 R63.1 R64.1 R65.1 R66.1 R67.1 R68.1 R69.1 R70.1 R71.1 R72.1 R73.1 R74.1 R75.1 R76.1 R77.1 R78.1 R79.1 R80.1 R81.1 R82.1 R83.1 R84.1 R85.1 R86.1 R87.1 R88.1 R89.1 R90.1 R91.1 R92.1 R93.1 R94.1 R95.1 R96.1 U1.3 U1.14 U2.3 U2.14 U3.3 U3.14 U4.3 U4.14 U5.3 U5.14 U6.3 U6.14 U7.3 U7.14 U8.3 U8.14 U9.3 U9.14 U10.3 U10.14 U11.3 U11.14 U12.3 U12.14 | length 816.8
  Top Layer w0.254: U1.3@-134.931,-12.8 v1(-120.036,-12.8) ; U2.3@-110.852,-12.8 v1(-95.956,-12.8) ; U3.3@-86.773,-12.8 v1(-71.877,-12.8) ; U4.3@-63.227,-12.8 v1(-48.331,-12.8) ; U5.3@-39.227,-12.8 v1(-24.331,-12.8) ; U6.3@-15.227,-12.8 v1(-0.331,-12.8) ; U7.3@8.773,-12.8 v1(23.669,-12.8) ; U8.3@32.773,-12.8 v1(47.669,-12.8) ; U9.3@56.773,-12.8 v1(71.669,-12.8) ; U10.3@80.773,-12.8 v1(95.669,-12.8) ; U11.3@104.773,-12.8 v1(119.669,-12.8) ; U12.3@128.773,-12.8 U12.14@135.173,-12.8 v1(143.669,-12.8) ; -120.342,-12.8 cw(c-120.342,-13.107) v1@-120.125,-12.89 ; -120.342,-12.8 ccw(c-120.342,-12.493) v1@-120.125,-12.71 ; -120.342,-12.8 cw(c-120.342,-13.107) v1@-120.125,-12.89 ; -120.342,-12.8 ccw(c-120.342,-12.493) v1@-120.125,-12.71 ; -120.342,-12.8 ccw(c-120.342,-12.493) v1@-120.125,-12.71 ; -120.342,-12.8 cw(c-120.342,-13.107) v1@-120.125,-12.89 ; -96.263,-12.8 cw(c-96.263,-13.107) v1@-96.046,-12.89 ; -96.263,-12.8 ccw(c-96.263,-12.493) v1@-96.046,-12.71 ; -96.263,-12.8 cw(c-96.263,-13.107) v1@-96.046,-12.89 ; -96.263,-12.8 ccw(c-96.263,-12.493) v1@-96.046,-12.71 ; -96.263,-12.8 ccw(c-96.263,-12.493) v1@-96.046,-12.71 ; -96.263,-12.8 cw(c-96.263,-13.107) v1@-96.046,-12.89 ; -72.184,-12.8 cw(c-72.184,-13.107) v1@-71.967,-12.89 ; -72.184,-12.8 ccw(c-72.184,-12.493) v1@-71.967,-12.71 ; -72.184,-12.8 cw(c-72.184,-13.107) v1@-71.967,-12.89 ; -72.184,-12.8 ccw(c-72.184,-12.493) v1@-71.967,-12.71 ; -72.184,-12.8 ccw(c-72.184,-12.493) v1@-71.967,-12.71 ; -72.184,-12.8 cw(c-72.184,-13.107) v1@-71.967,-12.89 ; -48.638,-12.8 cw(c-48.638,-13.107) v1@-48.421,-12.89 ; -48.638,-12.8 ccw(c-48.638,-12.493) v1@-48.421,-12.71 ; -48.638,-12.8 cw(c-48.638,-13.107) v1@-48.421,-12.89 ; -48.638,-12.8 ccw(c-48.638,-12.493) v1@-48.421,-12.71 ; -48.638,-12.8 ccw(c-48.638,-12.493) v1@-48.421,-12.71 ; -48.638,-12.8 cw(c-48.638,-13.107) v1@-48.421,-12.89 ; -24.638,-12.8 cw(c-24.638,-13.107) v1@-24.421,-12.89 ; -24.638,-12.8 ccw(c-24.638,-12.493) v1@-24.421,-12.71 ; -24.638,-12.8 cw(c-24.638,-13.107) v1@-24.421,-12.89 ; -24.638,-12.8 ccw(c-24.638,-12.493) v1@-24.421,-12.71 ; -24.638,-12.8 ccw(c-24.638,-12.493) v1@-24.421,-12.71 ; -24.638,-12.8 cw(c-24.638,-13.107) v1@-24.421,-12.89 ; -0.638,-12.8 cw(c-0.638,-13.107) v1@-0.421,-12.89 ; -0.638,-12.8 ccw(c-0.638,-12.493) v1@-0.421,-12.71 ; -0.638,-12.8 cw(c-0.638,-13.107) v1@-0.421,-12.89 ; -0.638,-12.8 ccw(c-0.638,-12.493) v1@-0.421,-12.71 ; -0.638,-12.8 ccw(c-0.638,-12.493) v1@-0.421,-12.71 ; -0.638,-12.8 cw(c-0.638,-13.107) v1@-0.421,-12.89 ; 23.362,-12.8 cw(c23.362,-13.107) v1@23.579,-12.89 ; 23.362,-12.8 ccw(c23.362,-12.493) v1@23.579,-12.71 ; 23.362,-12.8 cw(c23.362,-13.107) v1@23.579,-12.89 ; 23.362,-12.8 ccw(c23.362,-12.493) v1@23.579,-12.71 ; 23.362,-12.8 ccw(c23.362,-12.493) v1@23.579,-12.71 ; 23.362,-12.8 cw(c23.362,-13.107) v1@23.579,-12.89 ; 47.362,-12.8 cw(c47.362,-13.107) v1@47.579,-12.89 ; 47.362,-12.8 ccw(c47.362,-12.493) v1@47.579,-12.71 ; 47.362,-12.8 cw(c47.362,-13.107) v1@47.579,-12.89 ; 47.362,-12.8 ccw(c47.362,-12.493) v1@47.579,-12.71 ; 47.362,-12.8 ccw(c47.362,-12.493) v1@47.579,-12.71 ; 47.362,-12.8 cw(c47.362,-13.107) v1@47.579,-12.89 ; 71.362,-12.8 cw(c71.362,-13.107) v1@71.579,-12.89 ; 71.362,-12.8 ccw(c71.362,-12.493) v1@71.579,-12.71 ; 71.362,-12.8 cw(c71.362,-13.107) v1@71.579,-12.89 ; 71.362,-12.8 ccw(c71.362,-12.493) v1@71.579,-12.71 ; 71.362,-12.8 ccw(c71.362,-12.493) v1@71.579,-12.71 ; 71.362,-12.8 cw(c71.362,-13.107) v1@71.579,-12.89 ; 95.362,-12.8 cw(c95.362,-13.107) v1@95.579,-12.89 ; 95.362,-12.8 ccw(c95.362,-12.493) v1@95.579,-12.71 ; 95.362,-12.8 cw(c95.362,-13.107) v1@95.579,-12.89 ; 95.362,-12.8 ccw(c95.362,-12.493) v1@95.579,-12.71 ; 95.362,-12.8 ccw(c95.362,-12.493) v1@95.579,-12.71 ; 95.362,-12.8 cw(c95.362,-13.107) v1@95.579,-12.89 ; 119.362,-12.8 cw(c119.362,-13.107) v1@119.579,-12.89 ; 119.362,-12.8 ccw(c119.362,-12.493) v1@119.579,-12.71 ; 119.362,-12.8 cw(c119.362,-13.107) v1@119.579,-12.89 ; 119.362,-12.8 ccw(c119.362,-12.493) v1@119.579,-12.71 ; 119.362,-12.8 ccw(c119.362,-12.493) v1@119.579,-12.71 ; 119.362,-12.8 cw(c119.362,-13.107) v1@119.579,-12.89 ; 143.362,-12.8 cw(c143.362,-13.107) v1@143.579,-12.89 ; 143.362,-12.8 ccw(c143.362,-12.493) v1@143.579,-12.71 ; 143.362,-12.8 cw(c143.362,-13.107) v1@143.579,-12.89 ; 143.362,-12.8 ccw(c143.362,-12.493) v1@143.579,-12.71 ; 143.362,-12.8 ccw(c143.362,-12.493) v1@143.579,-12.71 ; 143.362,-12.8 cw(c143.362,-13.107) v1@143.579,-12.89
  Top Layer w1: P1.17@-88.362,-30.248 P1.19@-85.822,-30.248 -85.822,-32.712 ; C2.1@-57.868,-27.258 -54.413,-27.258 C4.1@-54.388,-27.284 -54.388,-30.179 -54.566,-30.357 -56.256,-30.357 ; C2.1@-57.856,-27.276 -57.918,-27.338 C1.1@-57.918,-30.357 -56.256,-30.357 ; v1(143.694,0.486) R96.1@140.75,0.486 R95.1@138.25,0.486 R94.1@135.75,0.486 R93.1@133.25,0.486 R92.1@130.75,0.486 R91.1@128.25,0.486 R90.1@125.75,0.486 R89.1@123.25,0.486 R88.1@116.75,0.486 R87.1@114.25,0.486 R86.1@111.75,0.486 R85.1@109.25,0.486 R84.1@106.75,0.486 R83.1@104.25,0.486 R82.1@101.75,0.486 R81.1@99.25,0.486 R80.1@92.75,0.486 R79.1@90.25,0.486 R78.1@87.75,0.486 R77.1@85.25,0.486 R76.1@82.75,0.486 R75.1@80.25,0.486 R74.1@77.75,0.486 R73.1@75.25,0.486 R72.1@68.742,0.486 R71.1@66.242,0.486 R70.1@63.742,0.486 R69.1@61.242,0.486 R68.1@58.742,0.486 R67.1@56.242,0.486 R66.1@53.742,0.486 R65.1@51.242,0.486 R64.1@44.75,0.486 R63.1@42.25,0.486 R62.1@39.75,0.486 R61.1@37.25,0.486 R60.1@34.75,0.486 R59.1@32.25,0.486 R58.1@29.75,0.486 R57.1@27.25,0.486 R56.1@20.75,0.486 R55.1@18.25,0.486 R54.1@15.75,0.486 R53.1@13.25,0.486 R52.1@10.75,0.486 R51.1@8.25,0.486 R50.1@5.75,0.486 R49.1@3.25,0.486 R48.1@-3.25,0.486 R47.1@-5.75,0.486 R46.1@-8.25,0.486 R45.1@-10.75,0.486 R44.1@-13.25,0.486 R43.1@-15.75,0.486 R42.1@-18.25,0.486 R41.1@-20.75,0.486 R40.1@-27.25,0.486 R39.1@-29.75,0.486 R38.1@-32.25,0.486 R37.1@-34.75,0.486 R36.1@-37.25,0.486 R35.1@-39.75,0.486 R34.1@-42.25,0.486 R33.1@-44.75,0.486 R32.1@-51.25,0.486 R31.1@-53.75,0.486 R30.1@-56.25,0.486 R29.1@-58.75,0.486 R28.1@-61.25,0.486 R27.1@-63.75,0.486 R26.1@-66.25,0.486 R25.1@-68.75,0.486 R24.1@-75.25,0.486 R23.1@-77.75,0.486 R22.1@-80.25,0.486 R21.1@-82.75,0.486 R20.1@-85.25,0.486 R19.1@-87.75,0.486 R18.1@-90.25,0.486 R17.1@-92.75,0.486 R16.1@-99.25,0.486 R15.1@-101.75,0.486 R14.1@-104.25,0.486 R13.1@-106.75,0.486 R12.1@-109.25,0.486 R11.1@-111.75,0.486 R10.1@-114.25,0.486 R9.1@-116.75,0.486 R8.1@-123.258,0.486 R7.1@-125.758,0.486 R6.1@-128.258,0.486 R5.1@-130.758,0.486 R4.1@-133.258,0.486 R3.1@-135.758,0.486 R2.1@-138.258,0.486 R1.1@-140.758,0.486 -143.327,0.486 -143.937,-0.124 -143.937,-30.273 -136.063,-38.147 -91.257,-38.147 -85.822,-32.712 ; -85.822,-32.712 -84.704,-33.829 -57.628,-33.829 -56.256,-32.458 -56.256,-30.357 ; C3.1@-55.198,-30.357 ccw(c-55.198,-29.597) C3.1@-54.661,-30.135 ; C3.1@-55.198,-30.357 ccw(c-55.198,-29.597) C3.1@-54.661,-30.135 ; C3.1@-55.198,-30.357 ccw(c-55.198,-29.597) C3.1@-54.661,-30.135
  Bottom Layer w0.254: v1(-120.036,-12.8) -119.972,-12.737 -119.972,0.448 v1(-120.01,0.486) ; v1(-95.956,-12.8) -95.893,-12.737 v1@-95.893,0.448 ; v1(-71.877,-12.8) -71.814,-12.737 v1@-71.814,0.448 ; v1(-48.331,-12.8) -48.268,-12.737 v1@-48.268,0.448 ; v1(-24.331,-12.8) -24.268,-12.737 v1@-24.268,0.448 ; v1(-0.331,-12.8) -0.268,-12.737 v1@-0.268,0.448 ; v1(23.669,-12.8) 23.732,-12.737 v1@23.732,0.448 ; v1(47.669,-12.8) 47.732,-12.737 v1@47.732,0.448 ; v1(71.669,-12.8) 71.732,-12.737 v1@71.732,0.448 ; v1(95.669,-12.8) 95.732,-12.737 v1@95.732,0.448 ; v1(119.669,-12.8) 119.732,-12.737 v1@119.732,0.448 ; v1(143.669,-12.8) 143.732,-12.737 v1@143.732,0.448 ; v1@-120.125,-12.71 ccw(c-120.495,-12.34) -119.972,-12.34 ; v1@-120.125,-12.71 ccw(c-120.495,-12.34) -119.972,-12.34 ; v1@-120.125,-12.71 ccw(c-120.495,-12.34) -119.972,-12.34 ; v1@-120.1,0.396 cw(c-120.409,0.088) -119.972,0.088 ; v1@-120.1,0.396 cw(c-120.409,0.088) -119.972,0.088 ; v1@-120.1,0.396 cw(c-120.409,0.088) -119.972,0.088 ; v1@-96.046,-12.71 ccw(c-96.416,-12.34) -95.893,-12.34 ; v1@-96.046,-12.71 ccw(c-96.416,-12.34) -95.893,-12.34 ; v1@-96.046,-12.71 ccw(c-96.416,-12.34) -95.893,-12.34 ; v1@-96.021,0.396 cw(c-96.329,0.088) -95.893,0.088 ; v1@-96.021,0.396 cw(c-96.329,0.088) -95.893,0.088 ; v1@-96.021,0.396 cw(c-96.329,0.088) -95.893,0.088 ; v1@-71.967,-12.71 ccw(c-72.337,-12.34) -71.814,-12.34 ; v1@-71.967,-12.71 ccw(c-72.337,-12.34) -71.814,-12.34 ; v1@-71.967,-12.71 ccw(c-72.337,-12.34) -71.814,-12.34 ; v1@-71.942,0.396 cw(c-72.25,0.088) -71.814,0.088 ; v1@-71.942,0.396 cw(c-72.25,0.088) -71.814,0.088 ; v1@-71.942,0.396 cw(c-72.25,0.088) -71.814,0.088 ; v1@-48.421,-12.71 ccw(c-48.791,-12.34) -48.268,-12.34 ; v1@-48.421,-12.71 ccw(c-48.791,-12.34) -48.268,-12.34 ; v1@-48.421,-12.71 ccw(c-48.791,-12.34) -48.268,-12.34 ; v1@-48.396,0.396 cw(c-48.704,0.088) -48.268,0.088 ; v1@-48.396,0.396 cw(c-48.704,0.088) -48.268,0.088 ; v1@-48.396,0.396 cw(c-48.704,0.088) -48.268,0.088 ; v1@-24.421,-12.71 ccw(c-24.791,-12.34) -24.268,-12.34 ; v1@-24.421,-12.71 ccw(c-24.791,-12.34) -24.268,-12.34 ; v1@-24.421,-12.71 ccw(c-24.791,-12.34) -24.268,-12.34 ; v1@-24.396,0.396 cw(c-24.704,0.088) -24.268,0.088 ; v1@-24.396,0.396 cw(c-24.704,0.088) -24.268,0.088 ; v1@-24.396,0.396 cw(c-24.704,0.088) -24.268,0.088 ; v1@-0.421,-12.71 ccw(c-0.791,-12.34) -0.268,-12.34 ; v1@-0.421,-12.71 ccw(c-0.791,-12.34) -0.268,-12.34 ; v1@-0.421,-12.71 ccw(c-0.791,-12.34) -0.268,-12.34 ; v1@-0.396,0.396 cw(c-0.704,0.088) -0.268,0.088 ; v1@-0.396,0.396 cw(c-0.704,0.088) -0.268,0.088 ; v1@-0.396,0.396 cw(c-0.704,0.088) -0.268,0.088 ; v1@23.579,-12.71 ccw(c23.209,-12.34) 23.732,-12.34 ; v1@23.579,-12.71 ccw(c23.209,-12.34) 23.732,-12.34 ; v1@23.579,-12.71 ccw(c23.209,-12.34) 23.732,-12.34 ; v1@23.604,0.396 cw(c23.296,0.088) 23.732,0.088 ; v1@23.604,0.396 cw(c23.296,0.088) 23.732,0.088 ; v1@23.604,0.396 cw(c23.296,0.088) 23.732,0.088 ; v1@47.579,-12.71 ccw(c47.209,-12.34) 47.732,-12.34 ; v1@47.579,-12.71 ccw(c47.209,-12.34) 47.732,-12.34 ; v1@47.579,-12.71 ccw(c47.209,-12.34) 47.732,-12.34 ; v1@47.604,0.396 cw(c47.296,0.088) 47.732,0.088 ; v1@47.604,0.396 cw(c47.296,0.088) 47.732,0.088 ; v1@47.604,0.396 cw(c47.296,0.088) 47.732,0.088 ; v1@71.579,-12.71 ccw(c71.209,-12.34) 71.732,-12.34 ; v1@71.579,-12.71 ccw(c71.209,-12.34) 71.732,-12.34 ; v1@71.579,-12.71 ccw(c71.209,-12.34) 71.732,-12.34 ; v1@71.604,0.396 cw(c71.296,0.088) 71.732,0.088 ; v1@71.604,0.396 cw(c71.296,0.088) 71.732,0.088 ; v1@71.604,0.396 cw(c71.296,0.088) 71.732,0.088 ; v1@95.579,-12.71 ccw(c95.209,-12.34) 95.732,-12.34 ; v1@95.579,-12.71 ccw(c95.209,-12.34) 95.732,-12.34 ; v1@95.579,-12.71 ccw(c95.209,-12.34) 95.732,-12.34 ; v1@95.604,0.396 cw(c95.296,0.088) 95.732,0.088 ; v1@95.604,0.396 cw(c95.296,0.088) 95.732,0.088 ; v1@95.604,0.396 cw(c95.296,0.088) 95.732,0.088 ; v1@119.579,-12.71 ccw(c119.209,-12.34) 119.732,-12.34 ; v1@119.579,-12.71 ccw(c119.209,-12.34) 119.732,-12.34 ; v1@119.579,-12.71 ccw(c119.209,-12.34) 119.732,-12.34 ; v1@119.604,0.396 cw(c119.296,0.088) 119.732,0.088 ; v1@119.604,0.396 cw(c119.296,0.088) 119.732,0.088 ; v1@119.604,0.396 cw(c119.296,0.088) 119.732,0.088 ; v1@143.579,-12.71 ccw(c143.209,-12.34) 143.732,-12.34 ; v1@143.579,-12.71 ccw(c143.209,-12.34) 143.732,-12.34 ; v1@143.579,-12.71 ccw(c143.209,-12.34) 143.732,-12.34 ; v1@143.604,0.396 cw(c143.296,0.088) 143.732,0.088 ; v1@143.604,0.396 cw(c143.296,0.088) 143.732,0.088 ; v1@143.604,0.396 cw(c143.296,0.088) 143.732,0.088
  other v1: -99.314,-33.401 -24.232,-32.868 -136.22,-22.225 -115.697,-21.336 -129.769,-21.057 -103.911,-19.583 -7.772,-19.507 -33.299,-18.745 -57.379,-18.618 -84.963,-17.907 -81.686,-17.628 133.147,-8.814 60.528,-7.493 84.582,-7.442 36.373,-7.264 -35.484,-7.188 108.509,-7.188 -11.735,-7.112 12.421,-7.061 -59.715,-6.807 -0.305,0.356 -95.931,0.486 -71.852,0.486 -48.306,0.486 -24.306,0.486 23.694,0.486 47.694,0.486 71.694,0.486 95.694,0.486 119.694,0.486 43.002,8.23
VCC3.3: C3.2 C4.2 D1.2 D2.2 D3.2 D4.2 D5.2 D6.2 D7.2 D8.2 D9.2 D10.2 D11.2 D12.2 D13.2 D14.2 D15.2 D16.2 D17.2 D18.2 D19.2 D20.2 D21.2 D22.2 D23.2 D24.2 D25.2 D26.2 D27.2 D28.2 D29.2 D30.2 D31.2 D32.2 D33.2 D34.2 D35.2 D36.2 D37.2 D38.2 D39.2 D40.2 D41.2 D42.2 D43.2 D44.2 D45.2 D46.2 D47.2 D48.2 D49.2 D50.2 D51.2 D52.2 D53.2 D54.2 D55.2 D56.2 D57.2 D58.2 D59.2 D60.2 D61.2 D62.2 D63.2 D64.2 D65.2 D66.2 D67.2 D68.2 D69.2 D70.2 D71.2 D72.2 D73.2 D74.2 D75.2 D76.2 D77.2 D78.2 D79.2 D80.2 D81.2 D82.2 D83.2 D84.2 D85.2 D86.2 D87.2 D88.2 D89.2 D90.2 D91.2 D92.2 D93.2 D94.2 D95.2 D96.2 P1.21 P1.23 | length 559.7
  Top Layer w1: P1.21@-83.282,-30.248 P1.23@-80.742,-30.248 ; C3.2@-52.153,-30.23 -52.094,-30.172 v1(-48.712,-30.172) v1(-47.646,-30.172) v1(-46.68,-30.172) v1(-45.69,-30.172) v1(-44.826,-30.172) v1(-44.013,-30.172) ; C3.2@-52.102,-30.179 C4.2@-52.102,-27.284
  Bottom Layer w1: D1.2@-140.75,1.8 -2.612,1.8 -2.132,1.32 2.132,1.32 2.612,1.8 144.233,1.8 145.217,0.816 145.217,-19.529 126.722,-38.024 -36.161,-38.024 v1(-44.013,-30.172) v1(-44.826,-30.172) v1(-45.69,-30.172) v1(-46.68,-30.172) v1(-47.646,-30.172) v1(-48.712,-30.172) -80.666,-30.172 P1.23@-80.742,-30.248 ; P1.23@-80.565,-30.425 cw(c-79.954,-31.035) -79.954,-30.172 ; P1.23@-80.565,-30.425 cw(c-79.954,-31.035) -79.954,-30.172 ; P1.23@-80.565,-30.425 cw(c-79.954,-31.035) -79.954,-30.172
VCC5V: C1.2 C2.2 P1.13 P1.15 U1.13 U2.13 U3.13 U4.13 U5.13 U6.13 U7.13 U8.13 U9.13 U10.13 U11.13 U12.13 | length 479
  Top Layer w0.254: U1.13@-128.531,-13.45 -130.724,-13.45 -131.705,-14.431 -131.705,-27.925 -127.021,-32.61 -122.906,-32.61 ; -107.626,-24.279 -107.626,-14.431 -106.645,-13.45 U2.13@-104.452,-13.45 ; -83.547,-24.279 -83.547,-14.431 -82.566,-13.45 U3.13@-80.373,-13.45 ; -60.001,-24.279 -60.001,-14.431 -59.02,-13.45 U4.13@-56.827,-13.45 ; -36.001,-24.279 -36.001,-14.431 -35.02,-13.45 U5.13@-32.827,-13.45 ; -12.001,-24.279 -12.001,-14.431 -11.02,-13.45 U6.13@-8.827,-13.45 ; 11.999,-24.279 11.999,-14.431 12.98,-13.45 U7.13@15.173,-13.45 ; 35.999,-24.279 35.999,-14.431 36.98,-13.45 U8.13@39.173,-13.45 ; 59.999,-24.279 59.999,-14.431 60.98,-13.45 U9.13@63.173,-13.45 ; 83.999,-24.279 83.999,-14.431 84.98,-13.45 U10.13@87.173,-13.45 ; 107.955,-24.279 107.999,-24.235 107.999,-14.431 108.98,-13.45 U11.13@111.173,-13.45 ; 131.999,-18.343 131.999,-14.431 132.98,-13.45 U12.13@135.173,-13.45
  Top Layer w1: P1.15@-90.902,-30.248 P1.13@-93.442,-30.248 -93.442,-32.407 -96.972,-35.938 -120.696,-35.938 -122.892,-33.742 -122.892,-30.208 -116.962,-24.279 -107.626,-24.279 -83.547,-24.279 -60.219,-24.279 ; C1.2@-60.204,-30.357 -60.204,-24.293 -60.219,-24.279 ; 131.999,-18.343 131.999,-24.279 107.955,-24.279 83.999,-24.279 59.999,-24.279 35.999,-24.279 11.999,-24.279 -12.001,-24.279 -36.001,-24.279 -60.001,-24.279 -60.219,-24.279
pads on no net: P1.9 P1.11

## Polygon pours and split planes (outlines as drawn)
GND on Top Layer "TopOverlay-No Net" (hatched 90Degree grid 0.508 track 0.254, remove dead copper, pour order 1000): -158,11.5 -158,-40.5 158,-40.5 158,11.5
GND on Bottom Layer "TopOverlay-No Net" (hatched 90Degree grid 0.508 track 0.254, remove dead copper, pour order 1001): -158,11.5 -158,-40.5 158,-40.5 158,11.5

## Keep-outs
Keep-Out Layer:
  circle w0.254: c-152,0 r5.461
  circle w0.254: c-152,-31.5 r5.461
  circle w0.254: c152,-31.5 r5.461
  circle w0.254: c152,0 r5.461
  circle w0.254: c0,-31.5 r5.461
  circle w0.254: c0,7.5 r5

## Silkscreen, mask and mechanical layers (free items; w line width, h text height)
Top Overlay:
  circle w0.254: c0,7.5 r2.25
  circle w0.254: c0,-31.5 r2.25
  circle w0.254: c152,0 r2.25
  circle w0.254: c152,-31.5 r2.25
  circle w0.254: c-152,0 r2.25
  circle w0.254: c-152,-31.5 r2.25
  lines w0.254: -146.936,-38.847 -146.936,9.513 146.865,9.513 ; -146.928,-38.856 146.865,-38.856 146.865,9.504 ; -97.333,-31.5 -97.384,-31.5 -97.384,-32.69 -120.574,-32.69 -120.574,-23.978 -69.012,-23.978 -69.012,-32.69 -92.888,-32.69 -92.888,-31.518
  text "The Six Hole Size Diameter=4.5mm" at -30.785,37.948 h2
  text "JIESHOU-V1" at -30.182,-27.834 h1.2
  text "2017-05-15" at -24.181,-29.693 h1.1
Bottom Overlay:
  lines w0.254: -143,0 -132,0 -121,0 ; -119,0 -108,0 -97,0 ; -95,0 -84,0 -73,0 ; -71,0 -60,0 -49,0 ; -47,0 -36,0 -25,0 ; -23,0 -12,0 -1,0 0,0 ; 1,0 12,0 23,0 ; 25,0 36,0 47,0 ; 49,0 60,0 71,0 ; 73,0 84,0 95,0 ; 97,0 108,0 119,0 ; 121,0 132,0 143,0 ; -143,-4.5 -121,-4.5 -121,4.5 -143,4.5 -143,-4.5 ; -119,-4.5 -97,-4.5 -97,4.5 -119,4.5 -119,-4.5 ; -95,-4.5 -73,-4.5 -73,4.5 -95,4.5 -95,-4.5 ; -71,-4.5 -49,-4.5 -49,4.5 -71,4.5 -71,-4.5 ; -47,-4.5 -25,-4.5 -25,4.5 -47,4.5 -47,-4.5 ; -23,-4.5 -1,-4.5 -1,4.5 -23,4.5 -23,-4.5 ; 1,-4.5 23,-4.5 23,4.5 1,4.5 1,-4.5 ; 25,-4.5 47,-4.5 47,4.5 25,4.5 25,-4.5 ; 49,-4.5 71,-4.5 71,4.5 49,4.5 49,-4.5 ; 73,-4.5 95,-4.5 95,4.5 73,4.5 73,-4.5 ; 97,-4.5 119,-4.5 119,4.5 97,4.5 97,-4.5 ; 121,-4.5 143,-4.5 143,4.5 121,4.5 121,-4.5
Mechanical 1:
  the board outline again, w0.254

## Dimensions
0,7.5 to 0,-31.5 on Top Overlay
-143,4.5 to -119,4.5 on Top Overlay
-158,-40.5 to 158,-40.5 on Top Overlay
-158,11.5 to -158,-40.5 on Top Overlay
-152,0 to 152,0 on Top Overlay
152,0 to 152,-31.5 on Top Overlay
0,7.5 to -152,0 on Top Overlay